# EAGLE board xdac_A (EAGLE 8.4.3)
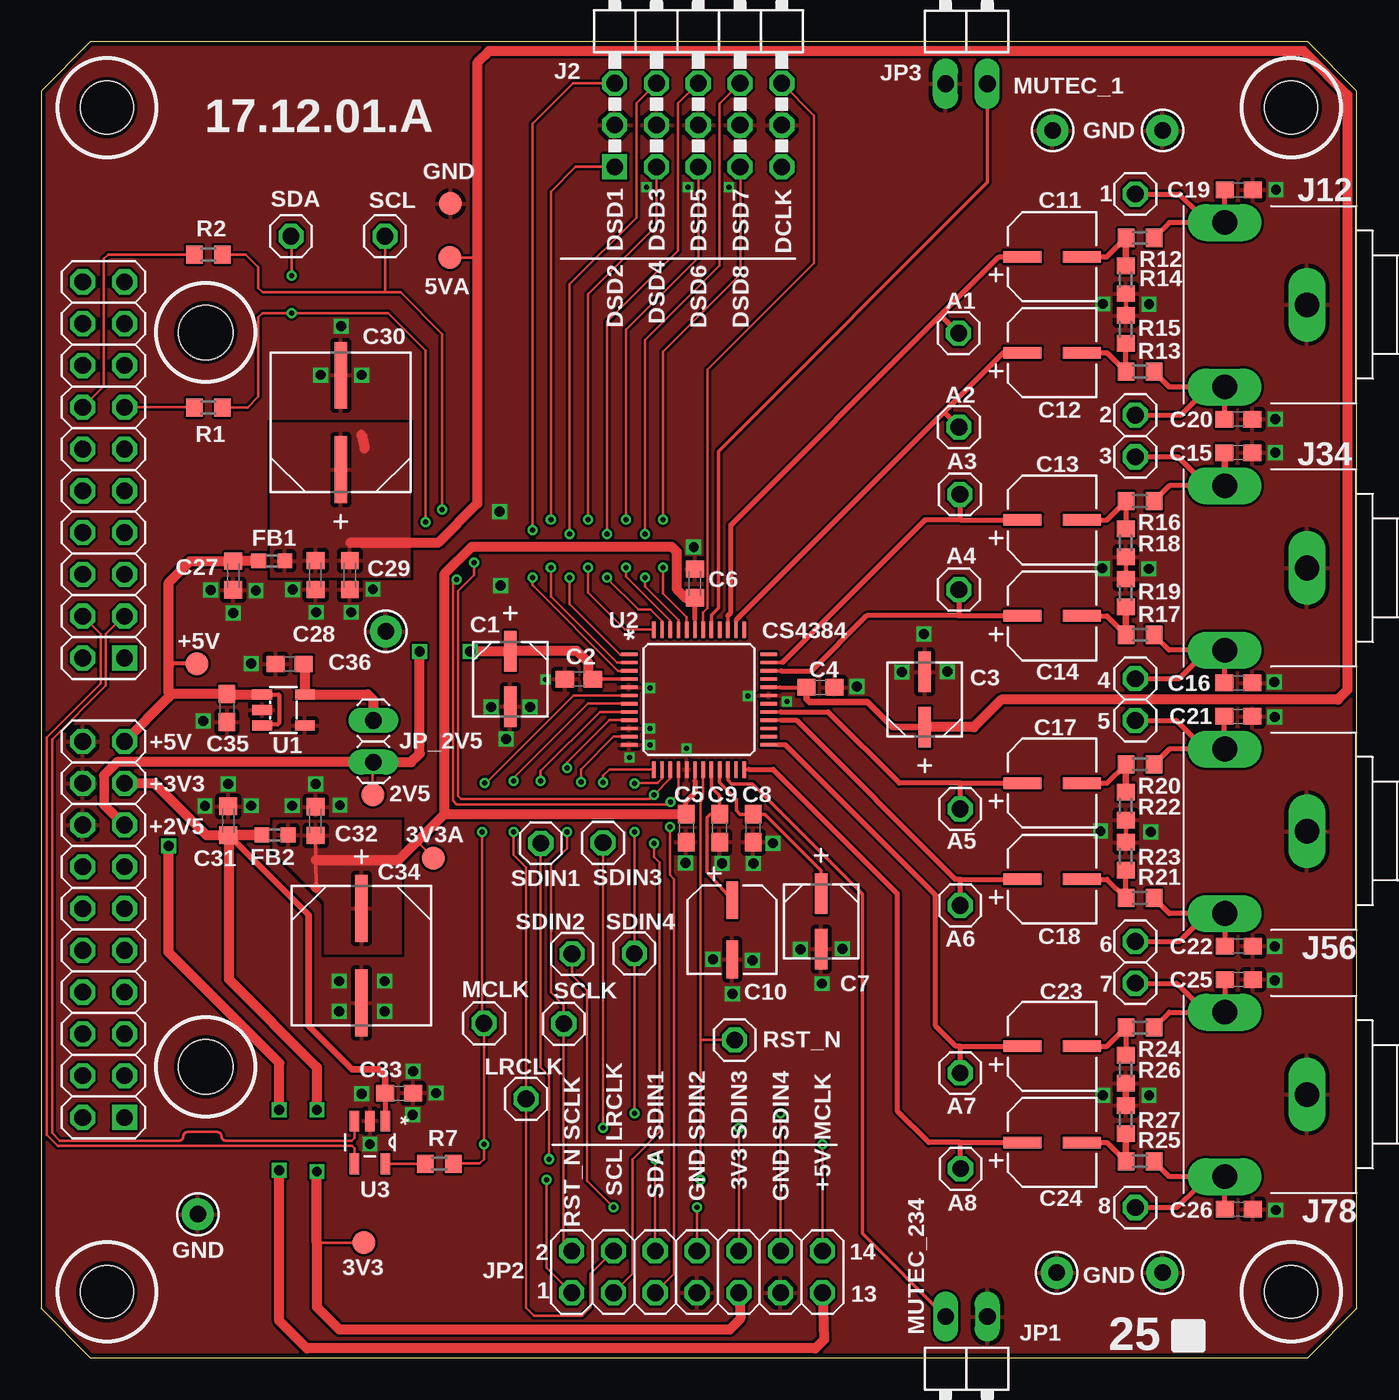
[diagram p0: board, top side]
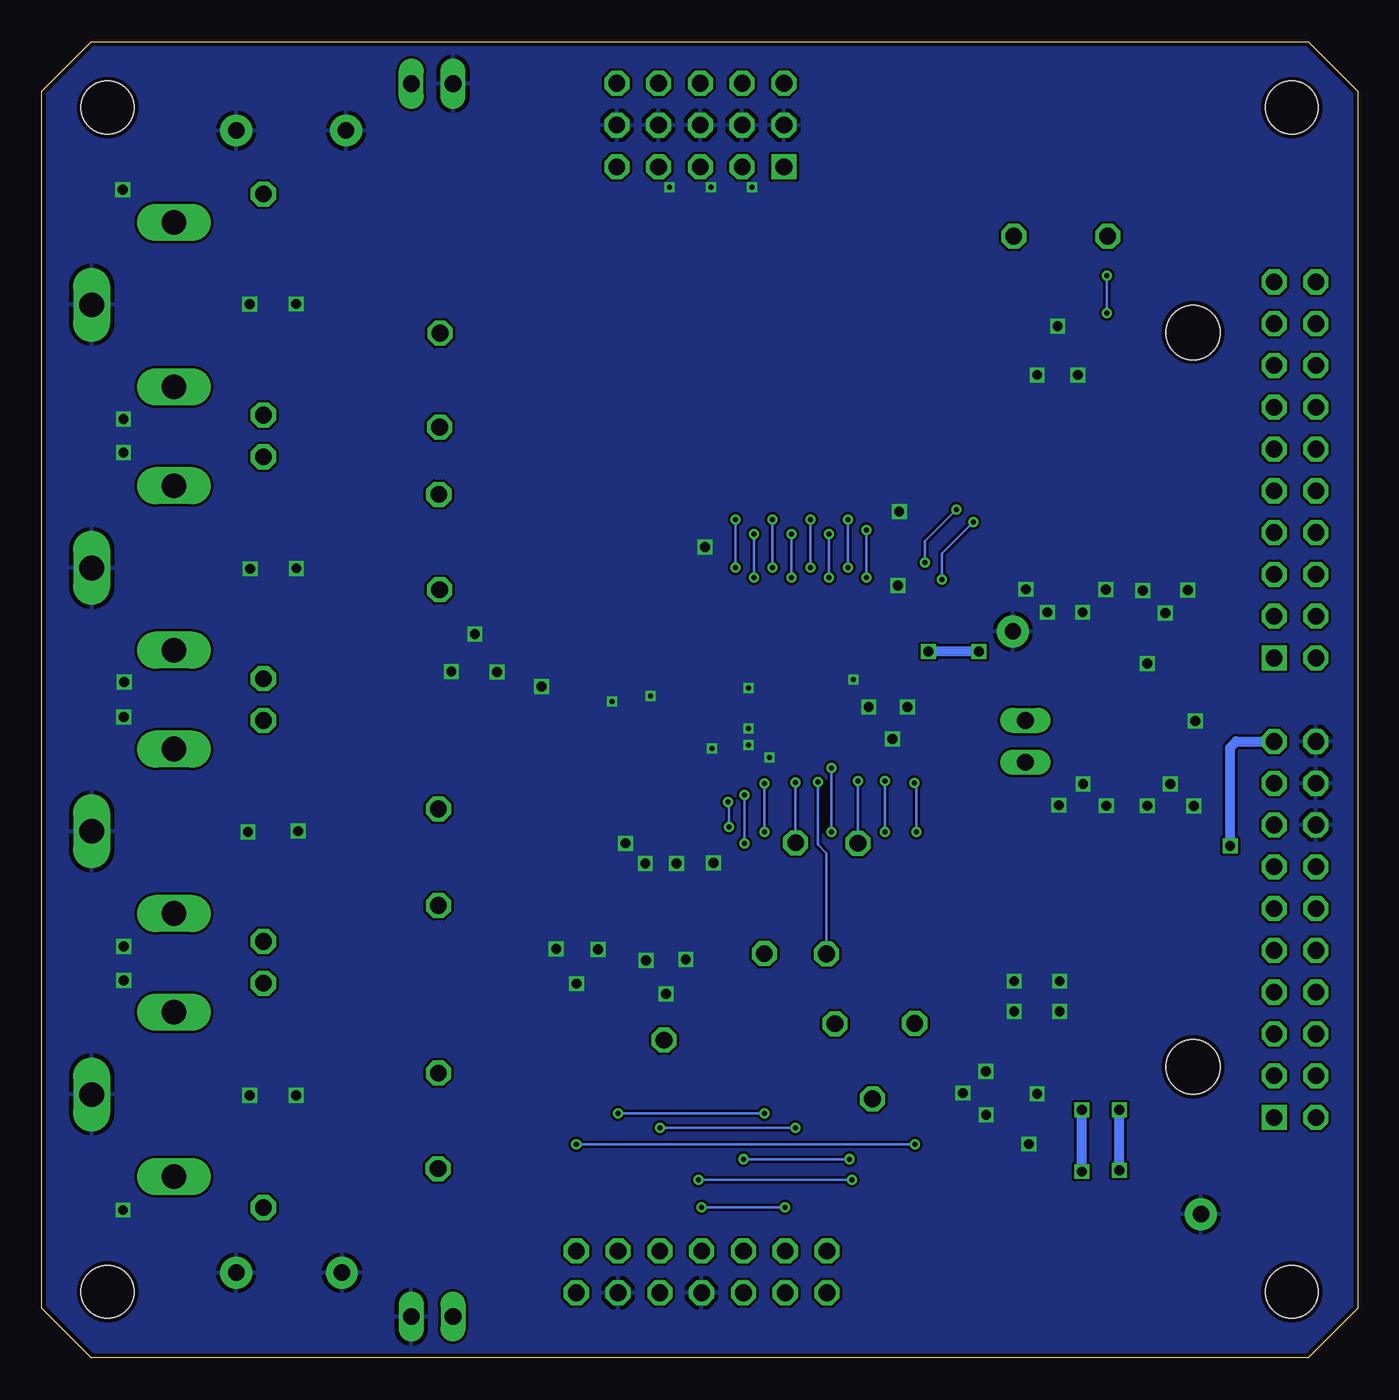
[diagram p1: board, bottom side, seen from below]

Size 80 x 80 mm. Coordinates in mm from the lower left corner, seen from the top.
Copper layers (1*16): Top 0.035mm / dielectric 1.5mm / Bottom 0.035mm
Design rules "SeeedStudio_2layer_DRU_no_angle_20140221": minimum track width 6mil, minimum drill 12mil, track to track 6mil, track to pad 6mil, pad to pad 6mil, via to via 6mil, smd to smd 0mil, copper to edge 10mil, drill to drill 10mil, minimum pad ring 10mil, minimum via ring 6mil, stop-mask expansion 2mil, vias tented up to drill 100mil, thermal gap 10mil
Holes 3.3 mm at 10,62.33 10,17.68

## Footprints (pad centres in the part's own frame; a part is rotated, then mirrored left to right if it is on the bottom)
1X01 = drill 1.016 octagon: 1 0,0
TP14R = smd 1.4 x 1.4: TP 0,0
EEE-FC1V1R0AR = smd 2.464 x 0.762: 1 -1.676,0; 2 1.676,0
C0603 = smd 1.1 x 1: 1 -0.85,0; 2 0.85,0
C0603K = smd 1.05 x 1.08: 1 -0.875,0; 2 0.875,0
EEE-FC1C220R = smd 2.3 x 0.7: 1 -1.8,0; 2 1.8,0
EEE-FC1V470P = smd 4.064 x 0.762: 1 -2.87,0; 2 2.87,0
L0603 = smd 0.9 x 0.9: 1 -0.8,0; 2 0.8,0
LIWE_40_PIN_8X8 = drill 1.016 square: 1 74.93,65.405; 101 74.93,37.465 | drill 1.016 octagon: 2 77.47,65.405; 3 74.93,62.865; 4 77.47,62.865; 5 74.93,60.325; 6 77.47,60.325; 7 74.93,57.785; 8 77.47,57.785; 9 74.93,55.245; 10 77.47,55.245; 11 74.93,52.705; 12 77.47,52.705; 13 74.93,50.165; 14 77.47,50.165; 15 74.93,47.625; 16 77.47,47.625; 17 74.93,45.085; 18 77.47,45.085; 19 74.93,42.545; 20 77.47,42.545; 102 77.47,37.465; 103 74.93,34.925; 104 77.47,34.925; 105 74.93,32.385; 106 77.47,32.385; 107 74.93,29.845; 108 77.47,29.845; 109 74.93,27.305; 110 77.47,27.305; 111 74.93,24.765; 112 77.47,24.765; 113 74.93,22.225; 114 77.47,22.225; 115 74.93,19.685; 116 77.47,19.685; 117 74.93,17.145; 118 77.47,17.145; 119 74.93,14.605; 120 77.47,14.605 | hole 3.2: 4,76; 4,4; 76,4; 76,76
3X05/90 = drill 1.016 square: 1 -5.08,-7.62 | drill 1.016 octagon: 2 -5.08,-5.08; 3 -5.08,-2.54; 4 -2.54,-7.62; 5 -2.54,-5.08; 6 -2.54,-2.54; 7 0,-7.62; 8 0,-5.08; 9 0,-2.54; 10 2.54,-7.62; 11 2.54,-5.08; 12 2.54,-2.54; 13 5.08,-7.62; 14 5.08,-5.08; 15 5.08,-2.54
FC68131 = drill 1.5 long: 1 0,0; 2 5,5; 5 5,-5
1X02/90 = drill 1.016 long: 1 -1.27,-3.81; 2 1.27,-3.81
2X07 = drill 1.016 octagon: 1 -7.62,-1.27; 2 -7.62,1.27; 3 -5.08,-1.27; 4 -5.08,1.27; 5 -2.54,-1.27; 6 -2.54,1.27; 7 0,-1.27; 8 0,1.27; 9 2.54,-1.27; 10 2.54,1.27; 11 5.08,-1.27; 12 5.08,1.27; 13 7.62,-1.27; 14 7.62,1.27
1X02 = drill 1.016 long: 1 -1.27,0; 2 1.27,0
R0603 = smd 1 x 1.1: 1 -0.85,0; 2 0.85,0
SOT-23-5 = smd 0.6 x 1.2: 1 -0.95,-1.3; 2 0,-1.3; 3 0.95,-1.3; 4 0.95,1.3; 5 -0.95,1.3
LQFP_48 = smd 0.2 x 1: 1 -2.75,-4.25; 2 -2.25,-4.25; 3 -1.75,-4.25; 4 -1.25,-4.25; 5 -0.75,-4.25; 6 -0.25,-4.25; 7 0.25,-4.25; 8 0.75,-4.25; 9 1.25,-4.25; 10 1.75,-4.25; 11 2.25,-4.25; 12 2.75,-4.25; 25 2.75,4.25; 26 2.25,4.25; 27 1.75,4.25; 28 1.25,4.25; 29 0.75,4.25; 30 0.25,4.25; 31 -0.25,4.25; 32 -0.75,4.25; 33 -1.25,4.25; 34 -1.75,4.25; 35 -2.25,4.25; 36 -2.75,4.25 | smd 1 x 0.2: 13 4.25,-2.75; 14 4.25,-2.25; 15 4.25,-1.75; 16 4.25,-1.25; 17 4.25,-0.75; 18 4.25,-0.25; 19 4.25,0.25; 20 4.25,0.75; 21 4.25,1.25; 22 4.25,1.75; 23 4.25,2.25; 24 4.25,2.75; 37 -4.25,2.75; 38 -4.25,2.25; 39 -4.25,1.75; 40 -4.25,1.25; 41 -4.25,0.75; 42 -4.25,0.25; 43 -4.25,-0.25; 44 -4.25,-0.75; 45 -4.25,-1.25; 46 -4.25,-1.75; 47 -4.25,-2.25; 48 -4.25,-2.75
SOT95P280X140-5N = smd 1.27 x 0.559: 1 -1.295,0.94; 2 -1.295,0; 3 -1.295,-0.94; 4 1.295,-0.94; 5 1.295,0.94
TEST_1MM = drill 1 pad 1.93: 1 0,0

## Placement (x,y rotation side)
1  [1X01]  66.52,70.74 0 top
2  [1X01]  66.52,57.3 0 top
2V5  TPTP14R  [TP14R]  20.17,34.21 0 top
3  [1X01]  66.52,54.76 0 top
3V3  TPTP14R  [TP14R]  19.63,6.99 0 top
3V3A  TPTP14R  [TP14R]  23.85,30.35 0 top
4  [1X01]  66.52,41.27 0 top
5  [1X01]  66.52,38.73 0 top
5VA  TPTP14R  [TP14R]  24.84,66.88 0 top
6  [1X01]  66.52,25.3 0 top
7  [1X01]  66.52,22.76 0 top
8  [1X01]  66.52,9.12 0 top
+5V  TPTP14R  [TP14R]  9.47,42.19 0 top
A1  [1X01]  55.78,62.28 0 top
A2  [1X01]  55.8,56.57 0 top
A3  [1X01]  55.85,52.48 0 top
A4  [1X01]  55.8,46.69 0 top
A5  [1X01]  55.88,33.35 0 top
A6  [1X01]  55.88,27.48 0 top
A7  [1X01]  55.88,17.3 0 top
A8  [1X01]  55.91,11.48 0 top
C1  1u, EEEFC1V1R0AR  [EEE-FC1V1R0AR]  28.52,41.25 270 top
C2  100n  [C0603]  32.69,41.25 180 top
C3  1u, EEEFC1V1R0AR  [EEE-FC1V1R0AR]  53.72,40.01 90 top
C4  100n  [C0603]  47.37,40.74 0 top
C5  100n  [C0603]  39.22,32.18 270 top
C6  100n  [C0603K]  39.75,47.07 90 top
C7  1u, EEEFC1V1R0AR  [EEE-FC1V1R0AR]  47.42,26.52 270 top
C8  100n  [C0603]  43.28,32.18 270 top
C9  100n  [C0603]  41.25,32.18 270 top
C10  47u, EEEFC0J470R  [EEE-FC1C220R]  42.01,26.01 270 top
C11  22u, EEEFC1C220R  [EEE-FC1C220R]  61.47,66.93 0 top
C12  22u, EEEFC1C220R  [EEE-FC1C220R]  61.47,61.09 0 top
C13  22u,EEEFC1C220R  [EEE-FC1C220R]  61.47,50.93 0 top
C14  22u, EEEFC1C220R  [EEE-FC1C220R]  61.47,45.09 0 top
C15  2n2  [C0603]  72.8,55.02 180 top
C16  2n2  [C0603]  72.8,41.02 180 top
C17  22u, EEEFC1C220R  [EEE-FC1C220R]  61.47,34.92 0 top
C18  22u, EEEFC1C220R  [EEE-FC1C220R]  61.47,29.08 0 top
C19  2n2  [C0603]  72.82,70.99 180 top
C20  2n2  [C0603]  72.8,57.05 180 top
C21  2n2  [C0603]  72.8,38.99 180 top
C22  2n2  [C0603]  72.82,25.02 180 top
C23  22u, EEEFC1C220R  [EEE-FC1C220R]  61.47,18.92 0 top
C24  22u, EEEFC1C220R  [EEE-FC1C220R]  61.47,13.08 0 top
C25  2n2  [C0603]  72.82,22.99 180 top
C26  2n2  [C0603]  72.82,9.02 180 top
C27  4u7  [C0603K]  11.68,47.55 270 top
C28  100n  [C0603K]  16.69,47.57 270 top
C29  2u2  [C0603K]  18.77,47.57 270 top
C30  47u, EEEFC1V470P  [EEE-FC1V470P]  18.21,56.85 90 top
C31  4u7  [C0603K]  11.38,32.64 90 top
C32  1u  [C0603K]  16.69,32.61 90 top
C33  100n, 0603  [C0603]  21.77,16.08 180 top
C34  47u, EEEFC1V470P  [EEE-FC1V470P]  19.48,24.43 270 top
C35  1u, 0603  [C0603]  11.3,39.5 270 top
C36  2u2, 0603  [C0603]  15.11,42.16 180 top
FB1  120R, 3A  [L0603]  14.02,48.44 180 top
FB2  120R, 500mA  [L0603]  14.22,31.78 180 top
GND___  TPTP14R  [TP14R]  24.89,70.15 0 top
J1  LIWE_40_PIN  [LIWE_40_PIN_8X8]  80,80 180 top
J2  PINHD-3X5/90  [3X05/90]  39.95,80.01 0 top
J12  FC68131  [FC68131]  76.96,64.01 180 top
J34  FC68131  [FC68131]  76.96,48 180 top
J56  FC68131  [FC68131]  76.96,32 180 top
J78  FC68131  [FC68131]  76.96,15.99 180 top
JP1  [1X02/90]  56.26,-1.32 180 top
JP2  [2X07]  39.88,5.21 0 top
JP3  [1X02/90]  56.26,81.25 0 top
JP_2V5  [1X02]  20.19,37.47 90 top
LRCLK  [1X01]  29.49,15.72 0 top
MCLK  [1X01]  26.92,20.32 0 top
R1  [R0603]  10.16,57.76 0 top
R2  [R0603]  10.16,67.06 180 top
R7  120R  [R0603]  24.21,11.79 180 top
R12  562R  [R0603]  66.8,68.07 0 top
R13  562R  [R0603]  66.8,59.94 0 top
R14  47k  [R0603]  65.94,65.53 270 top
R15  47k  [R0603]  65.94,62.51 270 top
R16  562R  [R0603]  66.8,52.07 0 top
R17  562R  [R0603]  66.8,43.94 0 top
R18  47k  [R0603]  65.94,49.53 270 top
R19  47k  [R0603]  65.94,46.48 270 top
R20  562R  [R0603]  66.8,36.07 0 top
R21  562R  [R0603]  66.8,27.94 0 top
R22  47k  [R0603]  65.94,33.53 270 top
R23  47k  [R0603]  65.94,30.48 270 top
R24  562R  [R0603]  66.8,20.07 0 top
R25  562R  [R0603]  66.8,11.94 0 top
R26  47k  [R0603]  65.94,17.53 270 top
R27  47k  [R0603]  65.94,14.48 270 top
RST_N  [1X01]  42.16,19.3 0 top
SCL  [1X01]  20.9,68.17 0 top
SCLK  [1X01]  31.78,20.29 0 top
SDA  [1X01]  15.19,68.17 0 top
SDIN1  [1X01]  30.38,31.27 0 top
SDIN2  [1X01]  32.28,24.54 0 top
SDIN3  [1X01]  34.16,31.29 0 top
SDIN4  [1X01]  36.07,24.56 0 top
U1  TLV70225  [SOT-23-5]  14.73,39.37 270 top
U2  CS4384  [LQFP_48]  40,40 270 top
U3  FIN1002  [SOT95P280X140-5N]  19.99,13.08 270 top
U$1  TEST-22-MULTICOMP  [TEST_1MM]  68.17,5.16 0 top
U$2  TEST-22-MULTICOMP  [TEST_1MM]  61.75,5.16 0 top
U$3  TEST-22-MULTICOMP  [TEST_1MM]  68.17,74.6 0 top
U$4  TEST-22-MULTICOMP  [TEST_1MM]  61.49,74.6 0 top
U$5  TEST-22-MULTICOMP  [TEST_1MM]  20.95,44.15 0 top
U$6  TEST-22-MULTICOMP  [TEST_1MM]  9.53,8.71 0 top

## Library data of the parts
1-8 A1-A8 J2 JP1 JP3 LRCLK MCLK RST_N SCL SCLK SDA SDIN1-SDIN4 = 25pinhead
2V5 3V3 3V3A 5VA +5V GND___ = testpad
C1 C3 C7 C10-C14 C17 C18 C23 C24 C30 C34 FB1 FB2 J1 J12 J34 J56 J78 U1-U3 U$1-U$6 = 25cmsquare
C2 C4-C6 C8 C9 C15 C16 C19-C22 C25-C29 C31-C33 C35 C36 R1 R2 R7 R12-R27 = rcl
JP2 = 25pinhead; SPICEPREFIX: X
JP_2V5 = pinhead

## Nets
2V5_OUT: C36.1 JP_2V5.2 U1.5
3V3A: 3V3A.TP C5.1 C6.1 C32.1 C34.1 FB2.1 U2.18 U2.43
5VA: 5VA.TP C3.1 C4.1 C28.1 C29.1 C30.1 FB1.1 U2.32
+2V5: 2V5.TP C1.1 C2.1 J1.15 JP_2V5.1 U2.4
+3V3: 3V3.TP C31.1 C33.2 FB2.2 J1.17 JP2.9 U3.1
+5V: +5V.TP C27.1 C35.1 FB1.2 J1.19 JP2.13 U1.1 U1.3
AOUT1: A1.1 C11.1 U2.39
AOUT2: A2.1 C12.1 U2.38
AOUT2_: 2.1 C20.2 J12.2 R13.2
AOUT3: A3.1 C13.1 U2.35
AOUT3_: 3.1 C15.2 J34.5 R16.2
AOUT4: A4.1 C14.1 U2.34
AOUT4_: 4.1 C16.2 J34.2 R17.2
AOUT5: A5.1 C17.1 U2.29
AOUT5_: 5.1 C21.2 J56.5 R20.2
AOUT6: A6.1 C18.1 U2.28
AOUT6_: 6.1 C22.2 J56.2 R21.2
AOUT7: A7.1 C23.1 U2.25
AOUT7_: 7.1 C25.2 J78.5 R24.2
AOUT8: A8.1 C24.1 U2.24
AOUT8_: 8.1 C26.2 J78.2 R25.2
AUOT1_: 1.1 C19.2 J12.5 R12.2
CLK_N: J1.104 U3.4
CLK_P: J1.103 U3.3
DSD1: J2.3 U2.3
DSD2: J2.1 U2.2
DSD3: J2.6 U2.1
DSD4: J2.4 U2.48
DSD5: J2.9 U2.47
DSD6: J2.7 U2.46
DSD7: J2.12 U2.45
DSD8: J2.10 U2.44
DSD_CLK: J2.15 U2.42
FILT+: C9.1 C10.1 U2.20
GND: C1.2 C2.2 C3.2 C4.2 C5.2 C6.2 C7.2 C8.2 C9.2 C10.2 C15.1 C16.1 C19.1 C20.1 C21.1 C22.1 C25.1 C26.1 C27.2 C28.2 C29.2 C30.2 C31.2 C32.2 C33.1 C34.2 C35.2 C36.2 GND___.TP J1.16 J1.18 J1.20 J2.2 J2.5 J2.8 J2.11 J2.14 J12.1 J34.1 J56.1 J78.1 JP1.1 JP2.7 JP2.11 JP3.1 R14.2 R15.1 R18.2 R19.1 R22.2 R23.1 R26.2 R27.1 U1.2 U1.4 U2.5 U2.10 U2.12 U2.17 U2.31 U3.2 U$1.1 U$2.1 U$3.1 U$4.1 U$5.1 U$6.1
LRCLK: JP2.4 LRCLK.1 U2.7
MCLK: JP2.14 MCLK.1 R7.1 U2.6
MUTEC_1: JP3.2 U2.41
MUTEC_234: JP1.2 U2.22
N$1: J1.113 R1.1
N$2: J1.114 R2.2
N$7: R7.2 U3.5
N$15: C11.2 R12.1 R14.1
N$16: C12.2 R13.1 R15.2
N$27: C13.2 R16.1 R18.1
N$28: C14.2 R17.1 R19.2
N$33: C17.2 R20.1 R22.1
N$34: C18.2 R21.1 R23.2
N$39: C23.2 R24.1 R26.1
N$40: C24.2 R25.1 R27.2
RST_N: JP2.1 RST_N.1 U2.19
SCL: JP2.3 R2.1 SCL.1 U2.15
SCLK: JP2.2 SCLK.1 U2.9
SDA: JP2.5 R1.2 SDA.1 U2.16
SDIN1: JP2.6 SDIN1.1 U2.8
SDIN2: JP2.8 SDIN2.1 U2.11
SDIN3: JP2.10 SDIN3.1 U2.13
SDIN4: JP2.12 SDIN4.1 U2.14
VQ: C7.1 C8.1 U2.21

## Tracks (layer width: path | path; a pad name or v marks a point on that pad's centre or on a via)
2V5_OUT
  Top 0.61: C36.1 16.03,42.09 U1.5 19.88,40.32 20.19,40.01 JP_2V5.2
3V3A
  Top 0.152: 3V3A.TP 23.85,30.38 22.86,31.37
  Top 0.203: 16.71,28.57 16.7,30.22 C32.1 | C5.1 39.18,32.99 | U2.18 39.75,35.08 | U2.43 39.75,44.91
  Top 0.305: C5.1 39.22,33.81 39.75,34.34 39.75,35.08 | 39.75,44.91 C6.1
  Top 0.61: C6.1 39.18,46.19 38.63,46.74 38.63,49 38.33,49.3 26.19,49.3 24.51,47.62 24.51,33.02 | C5.1 39.21,33.02 24.51,33.02 | 16.71,28.57 | 24.51,33.02 22.86,31.37 21.71,30.22 16.7,30.22
  pour Top: 14.12,32.61 21.87,32.61 21.87,24.56 17.27,24.56 17.27,27.69 14.12,30.84
5VA
  Top 0.152: 5VA.TP 26.52,66.88
  Top 0.203: C4.1 46.13,40.75 | U2.32 44.94,40.75
  Top 0.254: 44.94,40.75 46.13,40.75 arc-90 C4.1
  Top 0.406: C3.1 51.77,38.33 50.24,39.85 46.71,39.85 46.53,40.03 46.53,40.73 C4.1 46.15,40.73
  Top 0.61: C3.1 56.72,38.33 58.4,40.01 78.84,40.01 79.43,40.59 79.43,76.76 76.76,79.43 27.23,79.43 26.52,78.72 26.52,66.88 26.52,51.92 24.13,49.53 18.8,49.53 | 19.48,56.11 19.66,55.27
  pour Top: 14,47.5 22.4,47.5 22.4,56.77 14,56.77
+2V5  (via drill 0.6)
  Top 0.152: 2V5.TP 20.14,34.21 20.14,36.2 JP_2V5.1
  Top 0.203: 28.57,42.98 C1.1 | 33.25,41.29 C2.1 U2.4 | U2.4
  Top 0.584: 3.83,33.6 3.83,35.38
  Top 0.61: 33.25,41.29 33.25,42.29 32.56,42.98 28.57,42.98 | J1.15 3.83,33.6 | 3.83,35.38 3.85,35.4 3.85,35.42 4.63,36.2 20.14,36.2 22.5,36.2 23.01,36.7 v23.01,42.93 | C1.1 v26.09,42.93
  Bottom 0.61: v23.01,42.93 v26.09,42.93
+3V3  (via drill 0.6)
  Top 0.152: 3V3.TP 16.76,6.99
  Top 0.305: C33.2 20.92,14.39 U3.1
  Top 0.406: 16.26,25.91 16.26,26.42 | 16.26,25.91 16.26,20.17 18.9,17.53 20.57,17.53 20.92,17.18 C33.2 | 11.4,31.77 16.26,26.92 16.26,25.91
  Top 0.61: J1.17 6.89,34.91 10.06,31.75 11.37,31.75 C31.1 13.41,31.76 FB2.2 11.4,31.77 11.4,23.01 16.76,17.65 16.76,16.16 16.77,16.15 v16.76,15.06 | 20.89,16.1 C33.2 20.9,16.09 | JP2.9 42.52,2.36 41.86,1.7 18.14,1.7 16.76,3.07 16.76,6.99 v16.76,11.3
  Bottom 0.61: v16.76,11.3 v16.76,15.06
+5V  (via drill 0.6)
  Top 0.203: C27.1
  Top 0.254: +5V.TP 7.91,42.19 7.76,42.04 | U1.1 14.42,40.32 14.48,40.26 14.48,38.61 14.35,38.48 13.49,38.48 U1.3
  Top 0.61: C27.1 11.66,48.4 | FB1.2 11.7,48.44 C27.1 | J1.19 7.76,40.15 7.76,40.39 | 7.76,40.39 7.76,42.04 7.76,47.13 9.05,48.42 C27.1 | 7.76,40.39 7.8,40.35 C35.1 11.33,40.32 U1.1 | JP2.13 47.6,1.09 47.07,0.56 16.15,0.56 14.48,2.23 v14.48,11.38 | v7.75,31.11 7.75,24.64 14.48,17.91 v14.48,15.06
  Bottom 0.61: v14.48,11.38 v14.48,15.06 | v7.75,31.11 7.75,37.08 7.38,37.45 J1.19
AOUT1
  Top 0.203: U2.39 41.75,45.11
  Top 0.254: C11.1 58.7,66.85
  Top 0.305: 41.75,45.11 41.94,45.3 41.94,50.62 54.69,63.37 | C11.1 58.24,66.93 54.69,63.37 | A1.1 54.69,63.37
AOUT2
  Top 0.203: U2.38 42.25,44.84
  Top 0.254: 58.75,61.11 C12.1
  Top 0.305: 54.88,57.47 42.25,44.84 | 54.88,57.47 58.52,61.11 58.75,61.11 | A2.1 54.9,57.47 54.88,57.47
AOUT2_
  Top 0.305: C20.2 71.95,59.01 70.38,59.01 | R13.2 68.59,59.01 70.38,59.01 | 2.1 69.29,57.3 70.38,58.4 70.38,59.01
  Top 0.406: J12.2 71.95,59.01
AOUT3
  Top 0.203: U2.35 45.04,42.25 45.06,42.27
  Top 0.254: C13.1 58.65,50.8
  Top 0.305: 45.06,42.27 53.72,50.93 55.91,50.93 | 55.91,50.93 C13.1 | A3.1 55.85,50.98 55.91,50.93
AOUT3_
  Top 0.305: R16.2 68.58,53 70.36,53 | 70.36,53 J34.5 | 3.1 69.11,54.76 70.36,53.52 70.36,53
  Top 0.406: C15.2 J34.5
AOUT4
  Top 0.203: U2.34 44.99,41.75
  Top 0.254: 58.75,45.11 C14.1
  Top 0.305: 44.99,41.75 46.83,41.75 50.19,45.11 55.78,45.11 | 55.78,45.11 58.75,45.11 | A4.1 55.8,45.14 55.78,45.11
AOUT4_
  Top 0.305: R17.2 68.59,43 70.33,43 | 70.33,43 J34.2 | 71.95,42.99 C16.2 | 4.1 69.19,41.27 70.33,42.42 70.33,43
  Top 0.406: J34.2 71.95,42.99
AOUT5
  Top 0.203: U2.29 44.96,39.25
  Top 0.305: 44.96,39.25 47.85,39.25 52.17,34.92 55.88,34.92 | 55.88,34.92 C17.1 | A5.1 55.88,34.92
AOUT5_
  Top 0.305: R20.2 68.58,37 70.21,37 | 70.21,37 J56.5 | 71.95,37.01 C21.2 | 5.1 69.01,38.73 70.21,37.54 70.21,37
  Top 0.406: J56.5 71.95,37.01
AOUT6
  Top 0.203: U2.28 44.98,38.75
  Top 0.305: 55.91,29.08 55.58,29.08 45.91,38.75 44.98,38.75 | 55.91,29.08 C18.1 | A6.1 55.88,29.06 55.91,29.08
AOUT6_
  Top 0.305: 71.97,27 C22.2 | R21.2 68.59,27 70.26,27 | 70.26,27 J56.2 | 6.1 69.19,25.3 70.26,26.36 70.26,27
  Top 0.406: J56.2 71.97,27
AOUT7
  Top 0.203: U2.25 44.82,37.25
  Top 0.305: 44.82,37.25 45.25,37.25 54.38,28.12 54.38,20.17 55.63,18.92 55.88,18.92 | 55.88,18.92 C23.1 | A7.1 55.88,18.92
AOUT7_
  Top 0.305: C25.2 J78.5 | R24.2 68.58,20.99 70.4,20.99 70.28,21.11 70.28,21.51 69.04,22.76 7.1
  Top 0.406: 70.4,20.99 J78.5 | C25.2
AOUT8
  Top 0.203: U2.24 42.76,35.76 43.03,35.76
  Top 0.305: 43.03,35.76 44.5,35.76 52.05,28.22 52.05,15.01 53.98,13.08 55.88,13.08 | 55.88,13.08 C24.1 | A8.1 55.88,11.51 55.88,13.08
AOUT8_
  Top 0.305: R25.2 68.6,10.99 70.28,10.99 | 70.28,10.99 J78.2 C26.2 | 8.1 69.04,9.12 70.28,10.36 70.28,10.99
  Top 0.406: C26.2
AUOT1_
  Top 0.305: R12.2 68.59,69.01 70.43,69.01 | 70.43,69.01 J12.5 | 71.97,69.02 C19.2 | 1.1 69.22,70.74 70.38,69.57 70.38,69.06 70.43,69.01
  Top 0.406: R12.2 | J12.5 71.97,69.02
CLK_N
  Top 0.152: J1.104 2.55,45.08 3.63,43.99 3.63,40.98 0.36,37.71 0.36,13.54 1.02,12.88 18.92,12.88 19.05,12.72 U3.4
CLK_P
  Top 0.152: J1.103 5.02,45.08 3.94,43.99 3.94,40.86 0.66,37.58 0.66,13.66 1.14,13.18 8.38,13.18 arc90 8.65,13.45 arc-90 8.91,13.72 10.7,13.72 arc-90 10.96,13.45 arc90 11.23,13.18 18.87,13.18 19.05,13.36 U3.3
DSD1  (via drill 0.3)
  Top 0.152: U2.3 35.09,41.75 29.87,46.97 v29.87,47.41 | v29.87,50.32 29.87,75.01 32.33,77.47 J2.3
  Bottom 0.152: v29.87,47.41 v29.87,50.32
DSD2  (via drill 0.3)
  Top 0.152: 35.73,42.27 U2.2 35.02,42.25 30.99,46.28 v30.99,48.03 | v30.99,50.95 30.99,70.89 32.49,72.39 J2.1
  Bottom 0.152: v30.99,48.03 v30.99,50.95
DSD3  (via drill 0.3)
  Top 0.152: U2.1 35.2,42.75 32.13,45.82 v32.13,47.41 | v32.13,50.06 32.13,65.25 36.2,69.32 36.2,76.25 J2.6
  Bottom 0.152: v32.13,47.41 v32.13,50.06
DSD4  (via drill 0.3)
  Top 0.152: U2.48 37.24,44.26 35.49,44.26 33.25,46.51 v33.25,48.03 | v33.25,50.95 33.25,64.64 37.41,68.81 J2.4
  Bottom 0.152: v33.25,48.03 v33.25,50.95
DSD5  (via drill 0.3)
  Top 0.152: U2.47 37.75,44.77 37.06,45.47 36.32,45.47 34.42,47.37 v34.42,47.44 | v34.42,50.06 34.42,62.99 38.73,67.31 38.73,76.25 J2.9
  Bottom 0.152: v34.42,47.44 v34.42,50.06
DSD6  (via drill 0.3)
  Top 0.152: U2.46 38.25,44.81 35.56,47.5 v35.56,48.03 | v35.56,50.95 35.56,62.48 39.95,66.88 J2.7
  Bottom 0.152: v35.56,48.03 v35.56,50.95
DSD7  (via drill 0.3)
  Top 0.152: U2.45 38.75,44.84 36.7,46.89 v36.7,47.41 | 42.49,77.44 J2.12 41.25,76.22 41.25,66.4 36.7,61.85 v36.7,50.06
  Bottom 0.152: v36.7,47.41 v36.7,50.06
DSD8  (via drill 0.3)
  Top 0.152: U2.44 39.25,45.03 37.82,46.46 v37.82,48.03 | v37.82,50.95 37.82,61.16 42.52,65.86 42.52,72.36 J2.10
  Bottom 0.152: v37.82,48.03 v37.82,50.95
DSD_CLK
  Top 0.152: U2.42 40.25,45.3 40.52,45.57 40.52,60.05 46.99,66.52 46.99,75.51 J2.15
FILT+
  Top 0.203: U2.20 40.75,34.66 41.25,34.16 C9.1 | 41.24,33.02 C9.1 | C9.1 40.68,33.03 40.49,32.84 40.49,29.52 C10.1
GND  (via drill 0.3, 0.6)
  Top 0.254: R14.2 R15.1 | R18.2 R19.1 | R22.2 R23.1 | 77.99,32 J56.1
  Top 0.406: R26.2 R27.1
  other vias: 36.8,71.15 39.32,71.15 41.83,71.15 37.03,40.72 30.66,41.22 37.03,38.25 37.03,37.24 39.24,37.03 42.98,40.23 75.08,70.99 75.03,57.05 75.03,55.02 74.98,41.07 75.01,38.94 75.01,24.99 75.01,22.94 75.06,8.97 67.36,15.95 64.54,15.95 67.46,31.95 64.41,32 67.34,47.96 64.52,47.98 67.36,64.03 64.54,64.06 49.61,40.79 52.32,41.68 53.67,43.99 55.09,41.71 43.26,24.16 46.18,24.82 48.72,24.84 47.47,22.73 40.84,24.21 42.04,22.1 43.31,30.05 41.4,30.05 39.67,49.28 35.76,36.47 45.34,39.88 15.27,33.55 18.16,33.58 12.78,33.55 11.38,34.87 10.31,46.66 9.96,33.53 16.69,34.87 11.68,45.26 13.06,46.63 16.71,45.31 18.85,45.31 15.29,46.69 20.17,46.71 18.11,22.89 20.88,22.89 18.11,21.06 18.24,62.71 19.48,59.74 16.99,59.74 27.36,39.55 29.72,39.55 28.27,37.62 24,16.08 22.58,14.76 22.61,17.4 19.48,16.03 44.5,31.27 39.17,30.07 27.94,46.94 27.86,51.44 12.78,42.19 9.86,38.71 20.88,21.06 19.99,12.98
  pour Bottom: -0.84,80.47 80.42,80.47 80.42,-0.05 -0.84,-0.05
  pour Top (rank 6): -2.03,81.69 81.2,81.69 81.2,-3.1 -2.03,-3.1
LRCLK  (via drill 0.3)
  Top 0.152: U2.7 33.25,39.75 28.73,35.23 v28.73,35.06 | v28.73,31.95 28.73,30.56 29.49,29.79 LRCLK.1 29.49,3.02 29.97,2.54 32.89,2.54 33.4,3.05 33.4,5.08 JP2.4
  Bottom 0.152: v28.73,35.06 v28.73,31.95
MCLK  (via drill 0.3)
  Top 0.152: U2.6 32.38,40.25 26.92,34.8 26.95,34.82 v26.95,34.92 | v47.5,12.95 JP2.14 | v26.82,31.95 26.82,20.42 MCLK.1 v26.92,12.95 26.92,12.06 26.67,11.81 25.08,11.81 R7.1
  Bottom 0.152: v26.92,12.95 v47.5,12.95 | v26.95,34.92 26.82,34.8 v26.82,31.95
MUTEC_1
  Top 0.203: U2.41 40.75,45.14 41.17,45.57 41.17,55.09 57.53,71.45 JP3.2
MUTEC_234
  Top 0.152: 41.73,35.73 U2.22
  Top 0.203: U2.22 41.75,35.11 41.99,34.87 43.26,34.87 49.94,28.19 49.94,7.54 JP1.2
N$1
  Top 0.152: J1.113 9.29,57.77 R1.1
N$2
  Top 0.152: J1.114 3.81,59.05 3.81,66.8 4.06,67.06 R2.2
N$7
  Top 0.152: U3.5 R7.2
N$15
  Top 0.305: C11.2 64.81,66.93 R12.1
  Top 0.406: 63.75,66.93 C11.2 | R12.1 65.94,68.07 R14.1
N$16
  Top 0.305: 65.95,61.66 R13.1 64.81,61.09 C12.2
  Top 0.406: R15.2 65.95,61.66
N$27
  Top 0.305: 65.94,52.07 R18.1 | C13.2 64.81,50.93 R16.1
  Top 0.406: R16.1 65.94,52.07
N$28
  Top 0.305: C14.2 64.81,45.09 R17.1
  Top 0.406: R19.2 65.95,45.63 R17.1
N$33
  Top 0.305: C17.2 64.81,34.92 R20.1
  Top 0.406: R20.1 65.94,36.07 R22.1
N$34
  Top 0.305: 65.95,29.63 R21.1 64.81,29.08 C18.2
  Top 0.406: R23.2 65.95,29.63
N$39
  Top 0.305: 65.94,20.07 R26.1 | C23.2 64.81,18.92 R24.1
  Top 0.406: R24.1 65.94,20.07
N$40
  Top 0.305: C24.2 64.81,13.08 R25.1
  Top 0.406: R27.2 65.95,13.63 R25.1
RST_N  (via drill 0.3)
  Top 0.152: U2.19 40.25,33.98 40.08,33.81 40.08,19.3 | JP2.1 30.73,5.46 v30.73,10.79 | 40.08,19.3 v40.08,10.79 | RST_N.1 40.08,19.3
  Bottom 0.152: v30.73,10.79 v40.08,10.79
SCL  (via drill 0.3)
  Top 0.152: v37.26,31.24 37.26,30.43 37.59,30.1 37.59,13.72 35.94,12.06 35.94,5.08 JP2.3 | U2.15 38.25,35.2 v37.26,34.21 37.01,33.96 25.53,33.96 25.35,34.14 25.35,46.61 26.31,47.57 v26.31,48.34 | v24.38,51.56 24.38,62.23 21.84,64.77 20.9,64.77 | 20.9,64.77 SCL.1 | R2.1 12.45,67.06 13.21,66.29 13.21,65.02 13.46,64.77 20.9,64.77
  Bottom 0.152: v37.26,34.21 v37.26,31.24 | v26.31,48.34 26.31,49.63 v24.38,51.56
SCLK  (via drill 0.3)
  Top 0.152: U2.9 34.55,38.75 31.98,36.18 v31.98,35.84 | v31.98,31.95 31.98,30.96 30.99,29.97 30.99,22.2 31.77,21.41 SCLK.1 31.77,6.96 JP2.2
  Bottom 0.152: v31.98,35.84 v31.98,31.95
SDA  (via drill 0.3)
  Top 0.152: v25.27,47.3 25.04,47.07 25.04,33.86 25.27,33.63 38.12,33.63 v38.27,33.78 38.75,34.26 U2.16 | v23.37,50.8 23.37,61.21 21.08,63.5 v15.24,63.5 13.46,63.5 13.21,63.25 13.21,58.42 12.55,57.76 R1.2 | 15.24,68.12 v15.24,65.79 | 15.24,68.12 15.24,68.17 | v38.23,32.26 38.23,29.34 38.48,29.08 38.48,5.08 JP2.5 | SDA.1 15.24,68.12
  Bottom 0.152: v38.27,33.78 38.23,33.74 v38.23,32.26 | v23.37,50.8 25.27,48.9 v25.27,47.3 | v15.24,63.5 v15.24,65.79
SDIN1  (via drill 0.3)
  Top 0.152: U2.8 33.97,39.25 30.38,35.66 v30.38,35.05 | JP2.6 v37.34,12.06 | SDIN1.1 30.38,17.63 30.89,17.12 v30.89,12.06
  Bottom 0.152: v30.38,35.05 SDIN1.1 | v37.34,12.06 v30.89,12.06
SDIN2  (via drill 0.3)
  Top 0.152: U2.11 34.8,37.75 32.82,35.76 v32.82,35 | SDIN2.1 32.28,23.24 33.2,22.33 33.2,10.74 v34.8,9.14 | JP2.8 v39.88,9.14
  Bottom 0.152: v32.82,35 32.82,31.19 32.28,30.66 SDIN2.1 | v39.88,9.14 v34.8,9.14
SDIN3  (via drill 0.3)
  Top 0.152: v42.42,13.97 JP2.10 | SDIN3.1 v34.16,13.97 | v34.16,34.98 34.16,35.38 34.54,35.76 37.24,35.76
  Top 0.203: 37.24,35.76 U2.13
  Bottom 0.152: v34.16,34.98 SDIN3.1 | v34.16,13.97 v42.42,13.97
SDIN4  (via drill 0.3)
  Top 0.152: v36.07,31.95 SDIN4.1 v36.07,14.86 | U2.14 37.75,35.21 37.47,34.92 36.5,34.92 v36.07,34.9 | v44.96,14.86 JP2.12
  Bottom 0.152: v36.07,31.95 v36.07,34.9 | v36.07,14.86 v44.96,14.86
VQ
  Top 0.152: U2.21
  Top 0.203: C8.1 42.48,33.03 42.27,33.25 42.27,33.93 41.25,34.95 U2.21 | 43.29,33.02 44.02,33.02 47.42,29.62 C7.1
  Top 0.254: 43.29,33.02 C8.1

## Text on the board
tNames: MUTEC_1 | 17.12.01.A | GND | GND | DSD1 | DSD3 | DSD5 | DSD7 | DCLK | DSD4 | DSD2 | DSD6 | DSD8 | CS4384 | +5V | +3V3 | +2V5 | RST_N | SCLK | LRCLK | SCL | SDA | SDIN1 | GND | SDIN2 | 3V3 | SDIN3 | GND | SDIN4 | +5V | MCLK | GND | 2 | 14 | GND | 1 | 13 | MUTEC_234 | 25